# EAGLE board PCB Schematic (EAGLE 9.7.0)
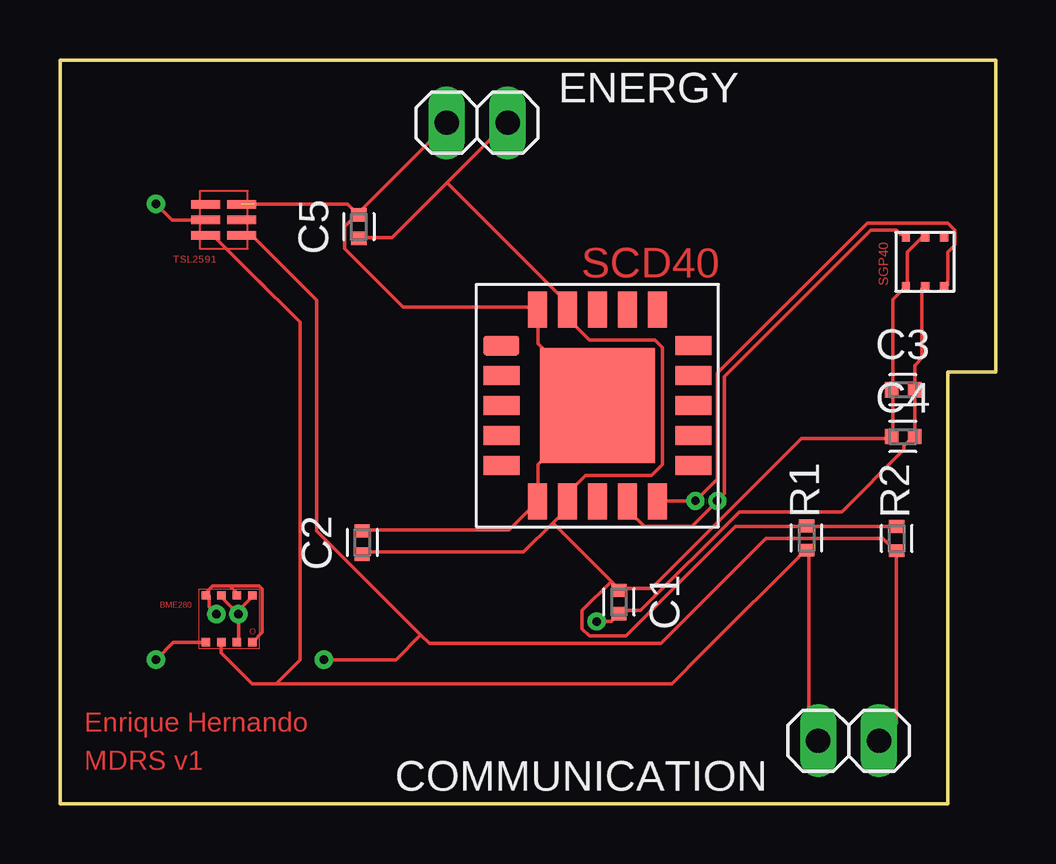
[diagram p0: board, top side]
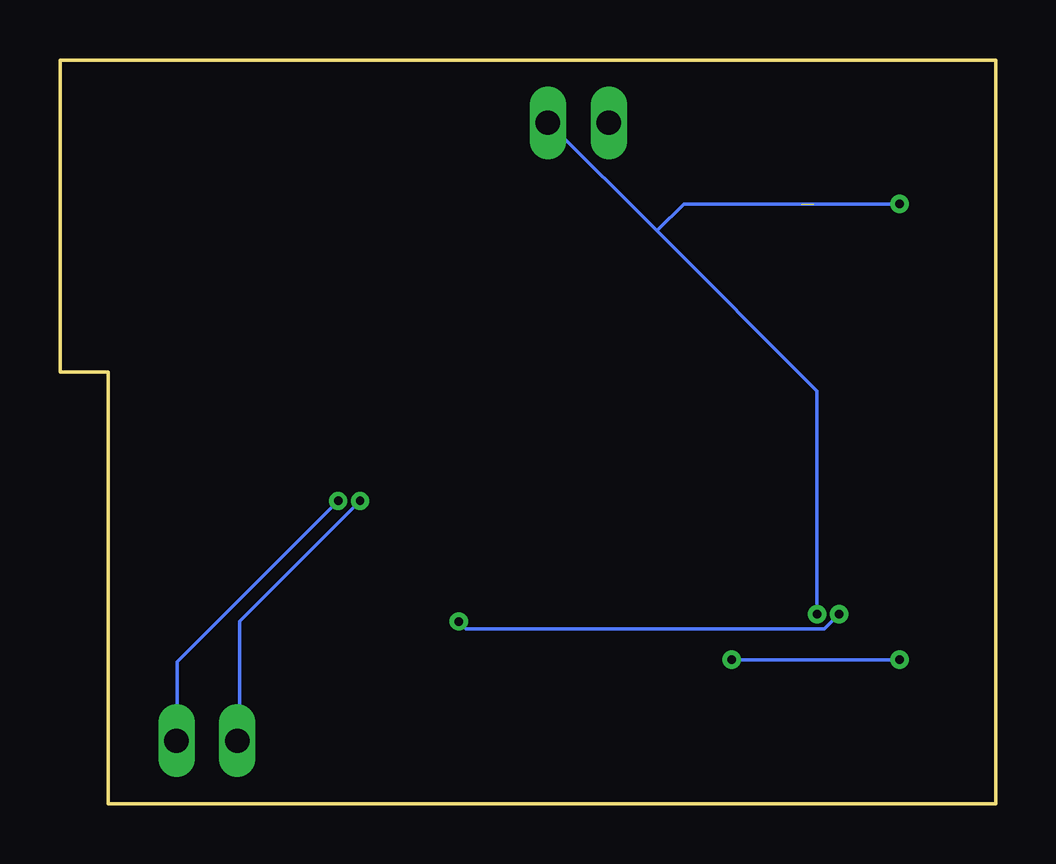
[diagram p1: board, bottom side, seen from below]

Size 39 x 31 mm. Coordinates in mm from the lower left corner, seen from the top.
Outline: 39,26 39,18 37,18 37,5 37,0 0,0 0,5 0,26 0,31 39,31 39,26
Copper layers (1*16): Top / Bottom
Stack-up Default Layer Stack: Top User Defined 0.035mm / Dielectric-1 User Defined 1.5mm / Bottom User Defined 0.035mm
Design rules: minimum copper width 6mil, minimum drill size 0.35mm, copper clearance wire_polygon to wire_polygon 6mil, copper clearance wire_polygon to pad_smd 6mil, copper clearance wire_polygon to via 6mil, copper clearance pad_smd to pad_smd 6mil, copper clearance pad_smd to via 6mil, copper clearance via to via 6mil, copper clearance smd to pad (same net) 6mil, copper clearance smd to via (same net) 6mil, copper clearance smd to smd (same net) 6mil, dimension clearance 40mil, via restrict clearance 0mil, restrict clearance 0mil, drill distance 6mil, keepout clearance 0mil

## Footprints (pad centres in the part's own frame; a part is rotated, then mirrored left to right if it is on the bottom)
BME280 = smd 0.35 x 0.35: P$1GND 0,-1.95; P$2CSB -0.65,-1.95; P$3SDI -1.3,-1.95; P$4SCK -1.95,-1.95; P$5SDO -1.95,0; P$6VDDIO -1.3,0; P$7GND -0.65,0; P$8VDD 0,0
CAPC1005X60 = smd 0.56 x 0.629: 1 -0.485,0; 2 0.485,0
1X02 = drill 1.016 long: 1 -1.27,0; 2 1.27,0
RESC1005X40 = smd 0.535 x 0.644: 1 -0.507,0; 2 0.507,0
SCD40 = smd 1.5 x 0.8: P$1DNC -4,2.5; P$2DNC -4,1.25; P$3DNC -4,0; P$4DNC -4,-1.25; P$5DNC -4,-2.5; P$11DNC 4,-2.5; P$12DNC 4,-1.25; P$13DNC 4,0; P$14DNC 4,1.25; P$15DNC 4,2.5 | smd 0.8 x 1.5: P$6GND -2.5,-4; P$7VDD -1.25,-4; P$8DNC 0,-4; P$9SCL 1.25,-4; P$10SDA 2.5,-4; P$16DNC 2.5,4; P$17DNC 1.25,4; P$18DNC 0,4; P$19VDDH -1.25,4; P$20GND -2.5,4 | smd 4.8 x 4.8: P$21GND 0,0
SGP40 = smd 0.4 x 0.35: P$1VDD 0.175,2.02; P$2VSS 0.175,1.22; P$3SDA 0.175,0.42; P$4N/A 2.265,0.42; P$5VDDH 2.265,1.22; P$6SCL 2.265,2.02
TSL2591 = smd 1.2 x 0.35: P$1SCL -0.75,0.65; P$2INT -0.75,0; P$3GND -0.75,-0.65; P$4NC 0.75,-0.65; P$5VDD 0.75,0; P$6SDA 0.75,0.65

## Placement (x,y rotation side)
BME280  BME280  [BME280]  8.03,8.68 0 top
C1  100nF  [CAPC1005X60]  23.3,8.4 270 top
C2  100nF  [CAPC1005X60]  12.6,10.88 90 top
C3  100nF  [CAPC1005X60]  35.14,17.25 0 top
C4  1uF  [CAPC1005X60]  35.14,15.3 0 top
C5  [CAPC1005X60]  12.46,24.05 90 top
COMMUNICATION  PINHD-1X02_1X02M  [1X02]  32.88,2.62 180 top
ENERGY  PINHD-1X02_1X02M  [1X02]  17.39,28.38 0 top
R1  4.7k  [RESC1005X40]  31.12,11.07 270 top
R2  4.7k  [RESC1005X40]  34.88,11.05 270 top
SCD40  SCD40  [SCD40]  22.4,16.59 0 top
SGP40  SGP40  [SGP40]  37.28,21.36 90 top
TSL2591  [TSL2591]  6.83,24.33 180 top

## Library data of the parts
BME280 SCD40 SGP40 TSL2591 = SENSORES
C1-C5 = Tinkercad; CATEGORY: Capacitor
COMMUNICATION ENERGY = Tinkercad
R1 R2 = Resistor; CATEGORY: Resistor; SUB-CATEGORY: Fixed

## Nets
+3.3V: BME280.P$2CSB BME280.P$6VDDIO BME280.P$8VDD C1.1 C2.1 C3.1 C4.1 C5.1 ENERGY.2 R1.1 R2.1 SCD40.P$7VDD SCD40.P$19VDDH SGP40.P$1VDD SGP40.P$5VDDH TSL2591.P$5VDD
GND: C2.2 C5.2 ENERGY.1 SCD40.P$6GND SCD40.P$20GND SCD40.P$21GND TSL2591.P$3GND
N$9: BME280.P$1GND BME280.P$5SDO BME280.P$7GND C1.2 C3.2 C4.2 SGP40.P$2VSS
SCL: BME280.P$4SCK COMMUNICATION.1 R2.2 SCD40.P$9SCL SGP40.P$6SCL TSL2591.P$1SCL
SDA: BME280.P$3SDI COMMUNICATION.2 R1.2 SCD40.P$10SDA SGP40.P$3SDA TSL2591.P$6SDA

## Tracks (layer width: path | path; a pad name or v marks a point on that pad's centre or on a via)
+3.3V  (via drill 0.35)
  Top 0.152: v7.44,7.9 7.44,8.05 8.05,8.66 BME280.P$8VDD | v7.44,7.9 7.44,6.83 BME280.P$2CSB | v7.44,7.9 6.83,8.5 6.83,8.66 BME280.P$6VDDIO | 16.12,25.88 18.56,28.32 ENERGY.2 | 16.12,25.88 13.84,23.59 12.47,23.59 C5.1 | 16.12,25.88 21,21 21,20.7 SCD40.P$19VDDH 21.15,20.55 21.15,20.24 22.07,19.33 24.81,19.33 25.12,19.02 25.12,14.14 24.66,13.69 21.92,13.69 21.15,12.93 21.15,12.62 SCD40.P$7VDD 21,12.47 21,12.16 20.55,11.71 | SGP40.P$5VDDH 35.94,23.59 35.33,22.98 35.33,21.61 SGP40.P$1VDD 35.17,21.46 34.72,21 34.72,17.34 C3.1 34.72,17.19 34.72,15.36 C4.1 34.57,15.21 30.91,15.21 24.66,8.96 23.44,8.96 C1.1 23.29,8.96 22.98,9.27 | R2.1 31.21,11.55 R1.1 31.06,11.55 28.16,11.55 23.59,6.98 22.07,6.98 21.76,7.29 21.76,8.05 22.98,9.27 | 20.55,11.71 19.33,10.49 12.62,10.49 C2.1 | 20.55,11.71 22.98,9.27 | TSL2591.P$5VDD 4.67,24.33 v4,25
  Bottom 0.152: v7.44,7.9 7.44,17.19 14.12,23.88 | 14.12,23.88 18.56,28.32 ENERGY.2 | v4,25 13,25 14.12,23.88
GND  (1 unrouted)
  Top 0.152: C5.2 12.47,24.66 16.12,28.32 ENERGY.1 | C2.2 12.62,11.4 18.72,11.4 19.78,12.47 SCD40.P$6GND 19.94,12.62 19.94,14.14 22.37,16.58 SCD40.P$21GND 22.37,16.73 19.94,19.17 19.94,20.55 SCD40.P$20GND 19.78,20.7 14.3,20.7 11.86,23.14 11.86,24.05 12.32,24.51 C5.2 | C5.2 12,25 8.09,25
N$9  (via drill 0.35)
  Top 0.152: SGP40.P$2VSS 35.94,21.46 35.94,18.56 35.63,18.26 35.63,17.34 C3.2 35.63,17.19 35.63,15.36 C4.2 35.48,15.21 35.17,14.91 35.17,14.75 32.58,12.16 28.32,12.16 24.2,8.05 23.44,8.05 C1.2 23.29,7.9 22.98,7.59 v22.37,7.59 | v6.52,7.9 6.22,8.2 6.22,8.66 BME280.P$5SDO | BME280.P$7GND 7.38,8.79 7.08,9.08 6.38,9.08 | 6.38,9.08 6.08,8.79 | 6.08,8.79 BME280.P$5SDO | BME280.P$1GND 8.43,7.13 8.43,8.95 8.3,9.08 6.38,9.08 | 6.38,9.08 6.08,8.79 | 6.08,8.79 BME280.P$5SDO
  Bottom 0.152: v6.52,7.9 7.13,7.29 22.07,7.29 v22.37,7.59
SCL  (via drill 0.35)
  Top 0.152: 34.87,3.32 34.87,10.49 | 34.26,2.71 34.87,3.32 | 34.87,10.49 R2.2 | 34.26,2.71 COMMUNICATION.1 | 35.17,23.75 35.02,23.75 34.87,23.9 33.8,23.9 27.71,17.8 27.71,12.93 v27.4,12.62 26.34,11.55 24.36,11.55 23.75,12.16 | 23.75,12.47 23.75,12.16 | 35.17,23.75 SGP40.P$6SCL | 23.75,12.47 SCD40.P$9SCL | 15.04,7.04 10.7,11.37 10.7,20.98 8,23.68 TSL2591.P$1SCL 8.11,23.68 | 15.04,7.04 15.4,6.68 25.05,6.68 29.43,11.06 34.31,11.06 34.83,10.54 R2.2 | COMMUNICATION.1 34.87,3.32 | COMMUNICATION.1 34.26,2.71 | 34.87,10.49 R2.2 | 35.17,23.75 SGP40.P$6SCL | SCD40.P$9SCL 23.75,12.16 | SCD40.P$9SCL 23.75,12.47 | COMMUNICATION.1 34.87,3.32 | COMMUNICATION.1 34.26,2.71 | 34.87,10.49 R2.2 | 35.17,23.75 SGP40.P$6SCL | 35.17,23.75 SGP40.P$6SCL | SCD40.P$9SCL 23.75,12.16 | SCD40.P$9SCL 23.75,12.47 | 15.04,7.04 14,6 v11,6 | BME280.P$4SCK 5.37,6.73 4.73,6.73 v4,6 | COMMUNICATION.1 34.87,3.32 | COMMUNICATION.1 34.26,2.71 | 34.87,10.49 R2.2 | 35.17,23.75 SGP40.P$6SCL | 35.17,23.75 SGP40.P$6SCL | SCD40.P$9SCL 23.75,12.16 | SCD40.P$9SCL 23.75,12.47
  Bottom 0.152: 34.11,2.71 34.11,5.91 v27.4,12.62 | 34.11,2.71 COMMUNICATION.1 | 34.11,2.71 COMMUNICATION.1 | 34.11,2.71 COMMUNICATION.1 | v11,6 5,6 v4,6 | 34.11,2.71 COMMUNICATION.1
SDA  (via drill 0.35)
  Top 0.152: COMMUNICATION.2 31.52,2.71 31.21,3.02 31.21,10.49 R1.2 31.07,10.56 26.83,6.32 25.5,5 8,5 | SGP40.P$3SDA 37,21.61 37,22.98 37.31,23.29 37.31,23.9 37,24.2 33.65,24.2 27.4,17.95 27.4,13.53 v26.49,12.62 24.96,12.62 SCD40.P$10SDA | 6.73,6.62 BME280.P$3SDI | BME280.P$3SDI 6.73,6.71 | TSL2591.P$6SDA 6.39,23.68 8.04,22.04 | 8,5 7,6 6.73,6.27 BME280.P$3SDI | 8.04,22.04 8.53,21.54 | 8.04,22.04 10,20.07 10,6 9,5 8,5
  Bottom 0.152: v26.49,12.62 31.52,7.59 31.52,2.71 COMMUNICATION.2

## Text on the board
Top: Enrique Hernando | MDRS v1